# Altium PCB SensorModule.PcbDoc
Units mil, origin at the board's own origin, x right, y up, seen from the top; angles counter-clockwise.
Board outline 3750 x 900 mil, 2 copper layers (Top Layer, Bottom Layer); 31 components, 25 nets, 111 pads, 53 vias.
Unrouted connection lines stored in the file: 2.
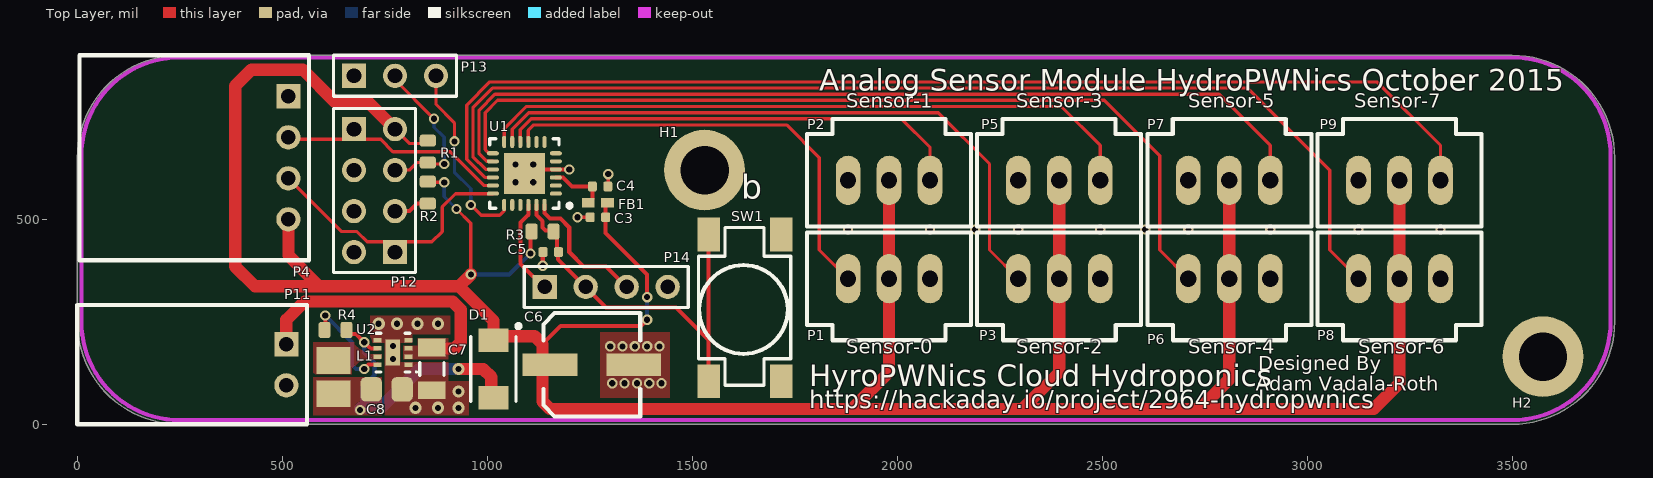
[diagram p0: Top Layer view]
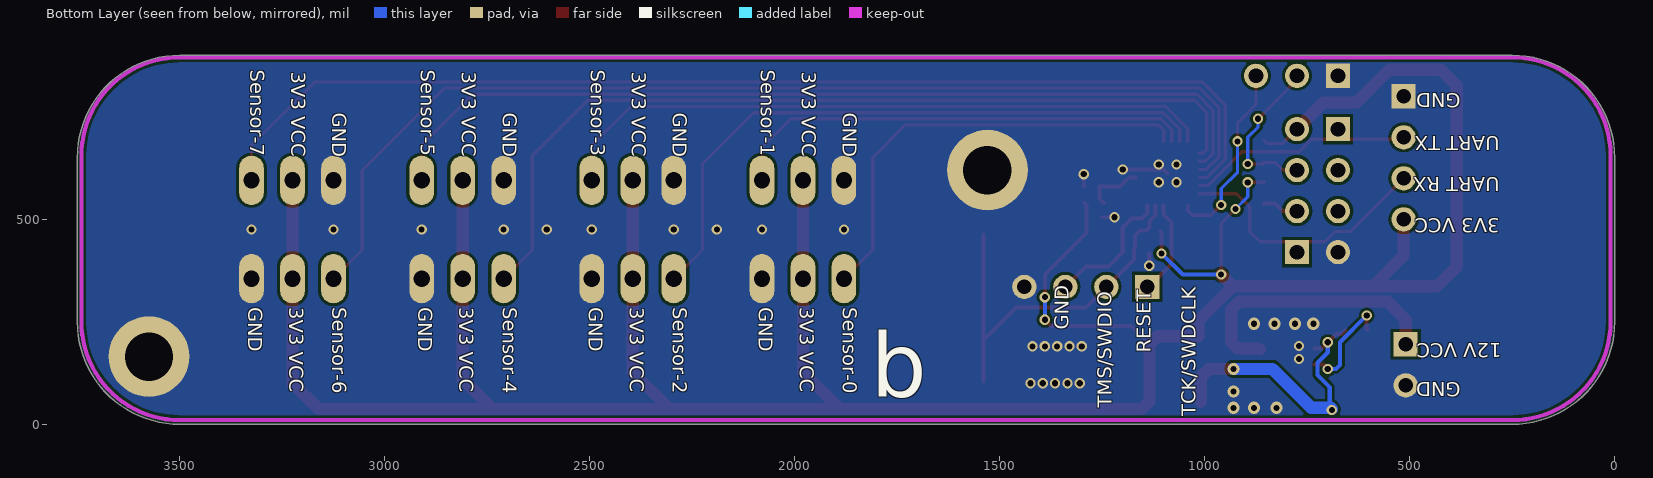
[diagram p1: Bottom Layer view, seen from below]

## Layer stack, top to bottom
Top Solder: solder mask 0.4, Solder Resist, Dk 3.5
Top Layer: signal copper 1.4
Dielectric 1: dielectric 12.6, FR-4, Dk 4.8
Bottom Layer: signal copper 1.4
Bottom Solder: solder mask 0.4, Solder Resist, Dk 3.5

## Board outline
0,250 ccw(c250,250) 250,0 3500,0 ccw(c3500,250) 3750,250 3750,650 ccw(c3500,650) 3500,900 250,900 ccw(c250,650) 0,650

## Design rules (kind name [scope] priority, off if disabled: settings)
AcuteAngle [All] p1: minimum=6.00000000000000E+0001 checktracksonly=FALSE
Clearance [All] p1: gap=7
ComponentClearance [All] p1: gap=7 collisioncheckmode=3 verticalgap=10 showdistances=TRUE
FanoutControl Fanout_SOIC [(InComponent('U8') AND InComponent('U7'))] p3: bgadir=Out bgaviamode=Centered fanoutstyle=Staggered fanoutdirection=Alternating viagrid=1 // Fanout_SOIC (Default Rule)
FanoutControl Fanout_Small [All] p4: bgadir=Out bgaviamode=Centered fanoutstyle=Auto fanoutdirection=Alternating viagrid=1 // Fanout_Small (Default Rule)
HoleSize [All] p1: absolutevalues=TRUE maxlimit=200 minlimit=15 maxpercent=80.000 minpercent=20.000
MinimumSolderMaskSliver [All] p1 off: minsoldermaskwidth=10
PasteMaskExpansion [All] p1: expansion=-1
PolygonConnect [All] p1: connectstyle=Direct reliefconductorwidth=10 reliefentries=4 polygonreliefangle="90 Angle" airgapwidth=10
RoutingVias [All] p1: holewidth=15 width=25 viastyle="Through Hole" minholewidth=15 minwidth=25 maxholewidth=28 maxwidth=50
SMDToCorner [All] p1: distance=30000
SilkToSilkClearance [All] p1 off: silktosilkclearance=10
SilkToSolderMaskClearance SilkscreenOverComponentPads [IsPad] p1 off: minsilkscreentomaskgap=10 clearancetoexposedcopper=TRUE
SolderMaskExpansion [All] p1: expansion=4
Width [All] p1: maxlimit=200 minlimit=7 preferedwidth=8 minimp=50.000000 maximp=50.000000 favimp=50.000000
22 further rules are at their usual default settings.

## Components (designator, comment, footprint, x,y, rotation, side; value= is the part's Value field where it differs from the comment)
C3 "100nF" C0402 1270,505 r180 top
C4 "100nF" C0402 1275,580 r0 top
C5 "100nF" C0402 1155,420 r180 top
C6 "EEE-1VA101XP" EEE-1VA101XP 1255,145 r180 top
C7 "10uF 50V" C1206 865,135 r270 top
C8 "0603" C0805 755,85 r180 top
D1 "PMEG4050EP" PMEG4050EP 1015,135 r270 top
FB1 "BLM15HG601SN1D" BLM18PG121SN1D 1270,540 r180 top
H1 "M3 Hole" Hole-3mm#1 1495,620 r0 top
H2 "M3 Hole" Hole-3mm#2 3495,155 r0 top
L1 "VLS252012T-2R2M1R3" VLS252012T-2R2M1R3 625,115 r270 top
P1 "Molex 70543-03" 70543-03 1980,355 r0 top
P2 "Molex 70543-03" 70543-03 1980,595 r180 top
P3 "Molex 70543-03" 70543-03 2395,355 r0 top
P4 "Molex 0705530003" 0705530003 515,800 r270 top
P5 "Molex 70543-03" 70543-03 2395,595 r180 top
P6 "Molex 70543-03" 70543-03 2810,355 r0 top
P7 "Molex 70543-03" 70543-03 2810,595 r180 top
P8 "Molex 70543-03" 70543-03 3225,355 r0 top
P9 "Molex 70543-03" 70543-03 3225,595 r180 top
P11 "Molex 0705530001" 0705530001 510,195 r270 top
P12 "Header 4X2" HDR2X4 775,420 r90 top
P13 "Header 3" HDR1X3 675,850 r0 top
P14 "Header 4" HDR1X4 1140,335 r0 top
R1 "1K" R0603 855,665 r90 top
R2 "1K" R0603 855,565 r90 top
R3 "1K" R0603 1135,470 r180 top
R4 "100K" R0603 630,230 r0 top
SW1 "TL3301AF160QG" TL3301AF160QG 1540,105 r90 top
U1 "MKL05Z16VFK4 - VQFN24" 98ASA00474D 1090.47,611.77 r180 top
U2 "TPS62162DSG" DSG8-1600X900TP 770,175 r180 top

## Footprints (in the part's own frame and the unit in brackets; to place one, negate y for a bottom-side part, rotate by r counter-clockwise, add the part's x,y. Pads: shape width x height; smd on the part's side, far side on the other; paste and mask are expansions set on the pad)
98ASA00474D [mm] "QFN, 24-Leads, Body 3.98x3.98mm, Pitch 0.50mm, Thermal Pad 2.80x2.80mm, IPC Medium Density"
  oval 0.75x0.25 smd: 1(-1.95,1.25) 2(-1.95,0.75) 3(-1.95,0.25) 4(-1.95,-0.25) 5(-1.95,-0.75) 6(-1.95,-1.25) 13(1.95,-1.25) 14(1.95,-0.75) 15(1.95,-0.25) 16(1.95,0.25) 17(1.95,0.75) 18(1.95,1.25)
  oval 0.25x0.75 smd: 7(-1.25,-1.95) 8(-0.75,-1.95) 9(-0.25,-1.95) 10(0.25,-1.95) 11(0.75,-1.95) 12(1.25,-1.95) 19(1.25,1.95) 20(0.75,1.95) 21(0.25,1.95) 22(-0.25,1.95) 23(-0.75,1.95) 24(-1.25,1.95)
  rect 2.54x2.54 smd: 25(0,0)
  silkscreen extent -2.93,-2.15 2.15,2.15, body extent -2,-2 2,2, height 1
70543-03 [mil]
  oval 60x120 hole 40: 1(-100,0) 2(0,0) 3(100,0)
  silkscreen extent -200,-150 200,113, body extent -200,-150 200,113, height 450
0705530001 [mm]
  rect 1.5x1.5 hole 0.9: 1(0,0)
  round 1.5 hole 0.9: 2(2.54,0)
  silkscreen extent -2.44,-12.95 4.95,1.27, body extent -2.41,-12.88 4.95,0.71, height 6.96
0705530003 [mm] "Molex 2.54mm 0705530003"
  rect 1.5x1.5 hole 0.9: 1(0,0)
  round 1.5 hole 0.9: 2(2.54,0) 3(5.08,0) 4(7.62,0)
  silkscreen extent -2.54,-12.95 10.16,1.27, body extent -2.54,-13.08 10.16,0.51, height 3.02
BLM18PG121SN1D [mm] "Chip Inductor, 2-Leads, Body 1.0x0.5mm, IPC Medium Density"
  rect 0.8x0.6 smd: 1(-0.6,0) 2(0.6,0)
  body extent -0.52,-0.28 0.53,0.27, height 0.6
C0402 [mil]
  rrect40% 22x24 smd: 1(-18.7,0) 2(19,0)
  body extent -20,-10 20,10, height 20
C0805 [mil]
  rrect50% 52x60 smd: 1(-37.4,0) 2(38,0)
  body extent -40,-30 40,30, height 35
C1206 [mm]
  rect 1.1x1.7 smd: 1(-1.325,0) 2(1.325,0)
  silkscreen extent -0.4,-0.75 0.4,0.75, body extent -1.68,-0.87 1.67,0.88, height 1.6
DSG8-1600X900TP [mm] "SON, 8-Leads, Body 2x2mm, Pitch 0.5mm, Thermal Pad 1.6x0.9mm, TI Recommended"
  rect 0.5x0.28 smd paste-0.14 mask+0.07: 1(-0.95,0.75) 2(-0.95,0.25) 3(-0.95,-0.25) 4(-0.95,-0.75) 5(0.95,-0.75) 6(0.95,-0.25) 7(0.95,0.25) 8(0.95,0.75)
  rect 0.9x1.6 smd paste-0.45 mask+0.07: 9(0,0)
  silkscreen extent -1.5,-1.2 1.05,1.25, body extent -1.05,-1.05 1.05,1.05, height 0.8
EEE-1VA101XP [mm] "Panasonic VS D EEE-1VA101XP"
  rect 3.4x1.4 smd: 1(2.6,0) 2(-2.6,0)
  silkscreen extent -3,-3.2 3,3.2, body extent -3.5,-3.3 3.5,3.3, height 5.4
HDR1X3 [mm] "Connector; Header; 3 Position"
  rect 1.5x1.5 hole 0.9: 1(0,0)
  round 1.5 hole 0.9: 2(2.54,0) 3(5.08,0)
  silkscreen extent -1.27,-1.27 6.35,1.27
HDR1X4 [mm] "Connector; Header; 4 Position"
  rect 1.5x1.5 hole 0.9: 1(0,0)
  round 1.5 hole 0.9: 2(2.54,0) 3(5.08,0) 4(7.62,0)
  silkscreen extent -1.27,-1.27 8.89,1.27
HDR2X4 [mm] "Connector; Header; 4x2 Position"
  rect 1.5x1.5 hole 0.9: 1(0,0) 8(7.62,2.54)
  round 1.5 hole 0.9: 2(0,2.54) 3(2.54,0) 4(2.54,2.54) 5(5.08,0) 6(5.08,2.54) 7(7.62,0)
  silkscreen extent -1.27,-1.27 8.89,3.81
Hole-3mm#1 [mm]
  round 5 hole 3: 1(0.889,0)
Hole-3mm#2 [mm]
  round 5 hole 3: 1(2.032,0.254)
PMEG4050EP [mm] "Molded Diode, 2-Leads, Body 3.80x2.50mm, IPC Medium Density"
  rect 1.45x1.85 smd: 1(-1.775,0) 2(1.775,0)
  silkscreen extent -2.77,-1.4 2,1.68, body extent -2,-1.35 2,1.35, height 1.1
R0603 [mm]
  rrect40% 0.74x1 smd: 1(-0.68,0) 2(0.68,0)
  body extent -0.8,-0.4 0.8,0.4, height 0.8
TL3301AF160QG [mm] "TL3301AF160QG Tactile Switch"
  rect 2.1x1.4 smd: 1(0,0) 1(9.1,0) 2(0,-4.5) 2(9.1,-4.5)
  silkscreen extent -0.25,-5.08 9.52,0.64, body extent -0.43,-5.26 9.57,0.74, height 5.11
VLS252012T-2R2M1R3 [mm] "Precision Wire Wound Inductor, 2-Leads, Body 2.5x2.0mm, IPC Medium Density"
  rect 1.65x2.1 smd: 1(-1.025,0) 2(1.025,0)
  body extent -1.3,-1.05 1.3,1.05, height 1.2

## Part data
C3 C4 C5: library part GRM155R71C104KA88D, "CAP CER 0402 100nF 16V 10% X7R"
C6: "CAP ALUM 100UF 35V 20% SMD"
C7: library part CL31A106KBHNNNE, "CAP CER 10UF 50V 10% X5R 1206"
C8: library part CL21A226KQQNNNE, "CAP CER 22UF 6.3V 10% X5R 0805"
D1: "PMEG4050EP , Schottky Diode"
H1 H2: library part Hole, "3mm Hole"
P1 P2 P3 P5 P6 P7 P8 P9: library part "Molex Endstop"
P4: library part 0705530003, "Molex 0705530003 Right Angle 2.54mm Shrouded Header"
P11: library part 0705530001, "Molex 0705530002 Right Angle 2.54mm Shrouded Header"
P12: "Header, 4-Pin, Dual row"
P13: "Header, 3-Pin"
P14: "Header, 4-Pin"
R1 R2 R3: library part ERJ-3EKF1001V, "RES 0603 1K 100mW 1%"
R4: library part RC0603FR-07100KL, "RES 100K OHM 1/10W 1% 0603 SMD"
U1: library part "MKL05Z16VFK4 - 24 Pin VQFN", "ARM Cortex M0+"
U2: library part TPS62162SOP

## Via types
v1: diameter 25, hole 15, Top Layer to Bottom Layer, tented both sides, 44 vias
v2: diameter 30, hole 15, Top Layer to Bottom Layer, tented both sides, 9 vias

## Nets (pads, with @x,y where several pads share a name; then routed paths per layer and width w, separated by ;. In a path a pad name is that pad's centre, name@x,y a point inside that pad or via, vN(x,y) a via of type N, cw(c..) or ccw(c..) an arc to the next point about the centre after c; other vN are vias at no path point)
3.3VCC: C3.1 C6.1 D1.1 FB1.1 P1.2 P2.2 P3.2 P4.4 P5.2 P6.2 P7.2 P8.2 P9.2 P12.7 R1.2 R2.2 R3.2 | length 7750
  Top Layer w8: P12.7 810,685 848.22,685 R1.2 ; R2.2 856.77,590 v1(895,590) ; v1(925,525) 960,490 v1@960,365.67
  Top Layer w10: v1(1105.47,416.77) 1105.47,467.24 R3.2 ; 1134.59,195.41 1179.18,240 1375,240 v1(1390,255) ; FB1.1 1288.7,535.08 C3.1 1288.7,466.3 1390,365 v1(1390,310)
  Top Layer w30: P4.4 515,411.5 590,336.5 ; P12.7 710,785 630,785 550,865 425,865 385,825 385,385 433.5,336.5 930.83,336.5 ; v1@960,365.67 930.83,336.5 ; P2.2 P1.2 1980,127 1890,37 ; P5.2 P3.2 2395,127 2305,37 ; 2737,37 2810,110 P6.2 P7.2 ; P9.2 P8.2 3225,100 3162,37 2305,37 ; 930.83,336.5 1015,252.33 1015,215 1115,215 1134.59,195.41 1134.59,55.41 1153,37 1890,37 ; 1890,37 2305,37
  Bottom Layer w8: v1(895,590) 895,555 v1(925,525)
  Bottom Layer w10: v1(960,365) 1053.7,365 v1(1105.47,416.77) ; v1(1390,255) v1(1390,310)
12VCC: C7.1 P11.1 U2.2 U2.3 | length 668.9
  Top Layer w30: P11.1 510,255 554.5,299.5 915.5,299.5 935,280 935,200 920,185 867.83,185 C7.1@865,182.17
ESP_01_RST: P12.5 P13.2 R1.1 | length 393.6
  Top Layer w8: P12.5 810,620 828.23,638.23 R1.1 ; P13.2 775,840 v1(870,745) ; R1.1@858.23,635 v1(895,635)
  Top Layer w10: R1.1 R1.1@858.23,635
  Bottom Layer w8: v1(870,745) 870,725 895,700 v1(895,635)
GND: C3.2 C4.2 C5.2 C6.2 C7.2 C8.1 H1.1 H2.1 P1.3 P2.3 P3.3 P4.1 P5.3 P6.3 P7.3 P8.3 P9.3 P11.2 P12.2 P13.1 P14.4 SW1.2 U1.4 U1.25 U2.1 U2.4 U2.5 U2.9 | length 205.4
  Top Layer w8: v1(1220,505) C3.2 ; C4.2@1295,581 v1(1295,610)
  Top Layer w10: U1.25 1100.31,621.61 U1.4 v1(1200,621.61) ; v1(1135.47,386.77) 1135.47,415.77 C5.2@1136.47,416.77 ; C4.2 C4.2@1295,581
  other v1: 1305,100 1335,100 1365,100 1395,100 1425,100 770,159.25 1300,190 1330,190 1360,190 1390,190 1420,190 770,190.75 1880,475 2080,475 2190,475 2295,475 2495,475 2605,475 2710,475 2910,475 3125,475 3325,475 1068.82,590.12 1112.13,590.12 1068.82,633.43 1112.13,633.43
  other v2: 825,40 880,40 930,40 930,80 735,245 780,245 830,245 880,245
K_CH_PD: P12.3 R2.1 | length 87.5
  Top Layer w10: P12.3 810,520 828.23,538.23 R2.1
K_ESP_RST: P13.3 U1.19 | length 460.2
  Top Layer w8: P13.3 875,780 920,735 v1(920,690) ; v1(960,535) 985,510 1030,510 1041.26,521.26 U1.19
  Bottom Layer w8: v1(920,690) 920,615 960,575 v1(960,535)
NetC4_1: C4.1 FB1.2 U1.3 | length 142.2
  Top Layer w10: U1.3 1185.04,601.93 1206.97,580 C4.1 1256.3,549.92 FB1.2
NetC8_2: C8.2 D1.2 L1.2 R4.2 U2.6 | length 713.1
  Top Layer w10: R4.2 666.78,220 680,220 v1(700,200) 715.16,184.84 U2.6
  Top Layer w30: v2(930,135) 990,135 1010,115 D1.2@1010,55.12
  Bottom Layer w10: v1(690,35) 695,40 695,90 725,120 725,150 700,175 v1(700,200)
  Bottom Layer w30: v1@690,37 693,40 695,40 740,40 835,135 v2(930,135)
NetL1_1: L1.1 U2.7
NetR4_1: R4.1 U2.8 | length 253.7
  Top Layer w10: R4.1 605,231.77 v1(605,265) ; v1(700,135) 710.47,145.47 U2.8
  Bottom Layer w10: v1(605,265) 670,200 670,145 680,135 v1(700,135)
RESET: C5.1 P14.2 R3.1 SW1.1 U1.23 | length 970.6
  Top Layer w10: U1.23 1120,510 1134.79,495.21 1134.79,480.21 1142.5,472.5 1157.5,472.5 1170,460 1170,430 1172.65,427.35 1172.65,402.35 P14.2 1290,285 1460,285 1540,205 ; SW1.1@1540,105 1540,205 ; SW1.1@1540,463.27 1540,205
SENSOR0: P1.1 U1.9 | length 1100.5
  Top Layer w8: U1.9 1100.32,716.68 1113.64,730 1730,730 1810,650 1810,425 P1.1
SENSOR1: P2.1 U1.10 | length 1149.1
  Top Layer w8: U1.10 1080.63,718.2 1107.43,745 2010,745 2080,675 P2.1
SENSOR2: P3.1 U1.11 | length 1572.7
  Top Layer w8: U1.11 1060.94,719.73 1101.21,760 2100,760 2225,635 2225,425 P3.1
SENSOR3: P5.1 U1.12 | length 1633.1
  Top Layer w8: U1.12 1041.26,721.26 1095,775 2400,775 2495,680 P5.1
SENSOR4: P6.1 U1.13 | length 2154.8
  Top Layer w8: U1.13 1004.02,660.98 995,670 995,760 1025,790 2505,790 2640,655 2640,425 P6.1
SENSOR5: P7.1 U1.14 | length 2230.5
  Top Layer w8: U1.14 998.7,641.3 980,660 980,766.21 1018.79,805 2785,805 2910,680 P7.1
SENSOR6: P8.1 U1.15 | length 2668
  Top Layer w8: U1.15 995.81,621.61 965,652.43 965,772.43 1012.57,820 2855,820 3055,620 3055,425 P8.1
SENSOR7: P9.1 U1.16 | length 2762
  Top Layer w8: U1.16 994.28,601.93 950,646.21 950,778.64 1006.36,835 3170,835 3325,680 P9.1
TCK/SWDCLK: P14.1 U1.22 | length 234.1
  Top Layer w10: U1.22 1100.32,511.12 1080.97,491.78 1080.97,391.27 1137.24,335 P14.1
TDI: 
TDO/SWO: 
TMS/SWDIO: P14.3 U1.24 | length 329.8
  Top Layer w10: U1.24 1139.68,515.31 1153.32,501.68 1178.32,501.68 1200,480 1200,420 1235,385 1290,385 P14.3
UART0_RX: P4.3 P12.1 U1.18 | length 646.7
  Top Layer w8: P4.3 645,470 682.31,470 707.31,445 865,445 890,470 890,530 922.56,562.56 U1.18
UART0_TX: P4.2 P12.8 U1.17 | length 561.6
  Top Layer w8: P4.2@525,690 P4.2 520,695 740,695 770,665 910,665 992.76,582.24 U1.17
pads on no net: P12.4 P12.6 U1.1 U1.2 U1.5 U1.6 U1.7 U1.8 U1.20 U1.21

## Polygon pours and split planes (outlines as drawn)
NetL1_1 on Top Layer "Bottom Layer-No Net" (solid, remove dead copper, pour order 10): 743,171 709.66,171 706.53,172.29 679.93,190.07 675,195 675,200 575,200 575,120 670,120 670,135 686.46,151.46 704.66,159 743,159
12VCC on Top Layer "Bottom Layer-No Net" (solid, remove dead copper, pour order 2): 905,158 795,158 795,192 830,192 830,210 905,210
GND on Top Layer "Bottom Layer-No Net" (solid, remove dead copper, pour order 4): 905,15 955,15 955,105 905,105 905,151 788,151 788,199 817,199 817,220 910,220 910,265 715,265 715,199 750,199 750,190 750,130 750,15
NetC8_2 on Top Layer "Bottom Layer-No Net" (solid, remove dead copper, pour order 6): 745,115 745,15 575,15 575,115
GND on Top Layer "Bottom Layer-No Net 1" (solid, pour order 43): 1275,225 1275,65 1445,65 1445,225
GND on Bottom Layer "Bottom Layer-No Net 1" (solid, remove dead copper, pour order 53): 3750,10 3750,895 3375,895 5,895 0,890 0,0

## Keep-outs
Keep-Out Layer:
  lines w10: 3740,245 3740,655 ccw(c3500,655) 3500,895 3335,895 690,895 250,895 ccw(c250,655) 10,655 10,250 ccw(c250,250) 250,10 690,10 3360,10 3500,10 ccw(c3500,250) 3740,250

## Silkscreen, mask and mechanical layers (free items; w line width, h text height)
Top Overlay:
  text "Analog Sensor Module HydroPWNics October 2015" at 1810,795 h90
  text "Sensor-1" at 1875,760 h60
  text "Sensor-3" at 2290,760 h60
  text "Sensor-5" at 2710,760 h60
  text "Sensor-7" at 3115,760 h60
  text "b" at 1620,530 h100
  text "Sensor-0" at 1875,160 h60
  text "Sensor-2" at 2290,160 h60
  text "Sensor-4" at 2710,160 h60
  text "Sensor-6" at 3125,160 h60
  text "Designed By" at 2880,120 h60
  text "HyroPWNics Cloud Hydroponics" at 1785,75 h90
  text "Adam Vadala-Roth" at 2875,70 h60
  text "https://hackaday.io/project/2964-hydropwnics" at 1785,25 h75
Bottom Overlay:
  text "Sensor-1" at 2095,865 h60 r90
  text "Sensor-3" at 2510,865 h60 r90
  text "Sensor-5" at 2925,865 h60 r90
  text "Sensor-7" at 3340,865 h60 r90
  text "3V3 VCC" at 1995,860 h60 r90
  text "3V3 VCC" at 2410,860 h60 r90
  text "3V3 VCC" at 2825,860 h60 r90
  text "3V3 VCC" at 3240,860 h60 r90
  text "GND" at 375,820 h60 r180
  text "GND" at 1895,760 h60 r90
  text "GND" at 2310,760 h60 r90
  text "GND" at 2725,760 h60 r90
  text "GND" at 3140,760 h60 r90
  text "UART TX" at 280,715 h60 r180
  text "UART RX" at 280,615 h60 r180
  text "3V3 VCC" at 280,515 h60 r180
  text "Sensor-0" at 1895,285 h60 r90
  text "3V3 VCC" at 2000,285 h60 r90
  text "GND" at 2100,285 h60 r90
  text "Sensor-2" at 2310,285 h60 r90
  text "3V3 VCC" at 2415,285 h60 r90
  text "GND" at 2515,285 h60 r90
  text "Sensor-4" at 2725,285 h60 r90
  text "3V3 VCC" at 2830,285 h60 r90
  text "GND" at 2930,285 h60 r90
  text "Sensor-6" at 3140,285 h60 r90
  text "3V3 VCC" at 3245,285 h60 r90
  text "GND" at 3345,285 h60 r90
  text "GND" at 1320,230 h60 r270
  text "12V VCC" at 275,210 h60 r180
  text "RESET" at 1120,175 h60 r270
  text "GND" at 375,115 h60 r180
  text "TMS/SWDIO" at 1215,40 h60 r270
  text "TCK/SWDCLK" at 1010,20 h60 r270
  text "b" at 1815,15 h270
Mechanical 15:
  the board outline again, w10

## Dimensions
3750,650 to 0,650 on Mechanical 13
3500,900 to 3500,0 on Mechanical 13

## Text inside footprints (layer, text, board x,y; h text height)
P1: Mechanical 8 "1" at 1817.5,292.5 h62
P2: Mechanical 8 "1" at 2142.5,657.5 h62 r180
P3: Mechanical 8 "1" at 2232.5,292.5 h62
P5: Mechanical 8 "1" at 2557.5,657.5 h62 r180
P6: Mechanical 8 "1" at 2647.5,292.5 h62
P7: Mechanical 8 "1" at 2972.5,657.5 h62 r180
P8: Mechanical 8 "1" at 3062.5,292.5 h62
P9: Mechanical 8 "1" at 3387.5,657.5 h62 r180